# EAGLE board PCB_ALIM_version 8 problème pistes (EAGLE 9.6.2)
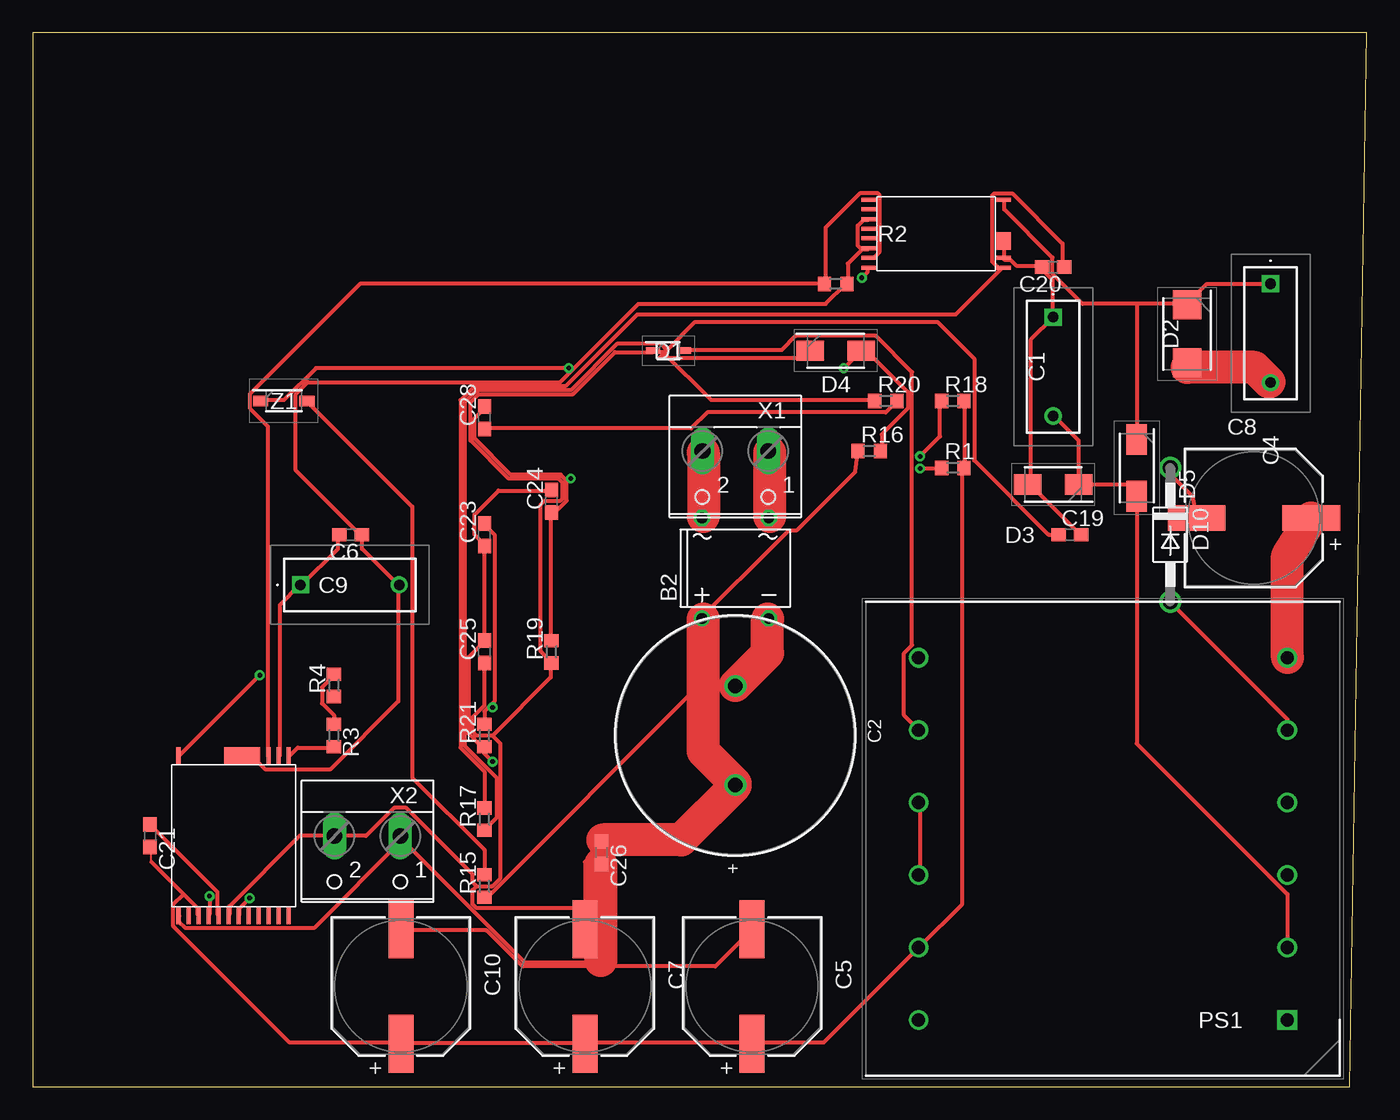
[diagram p0: board, top side]
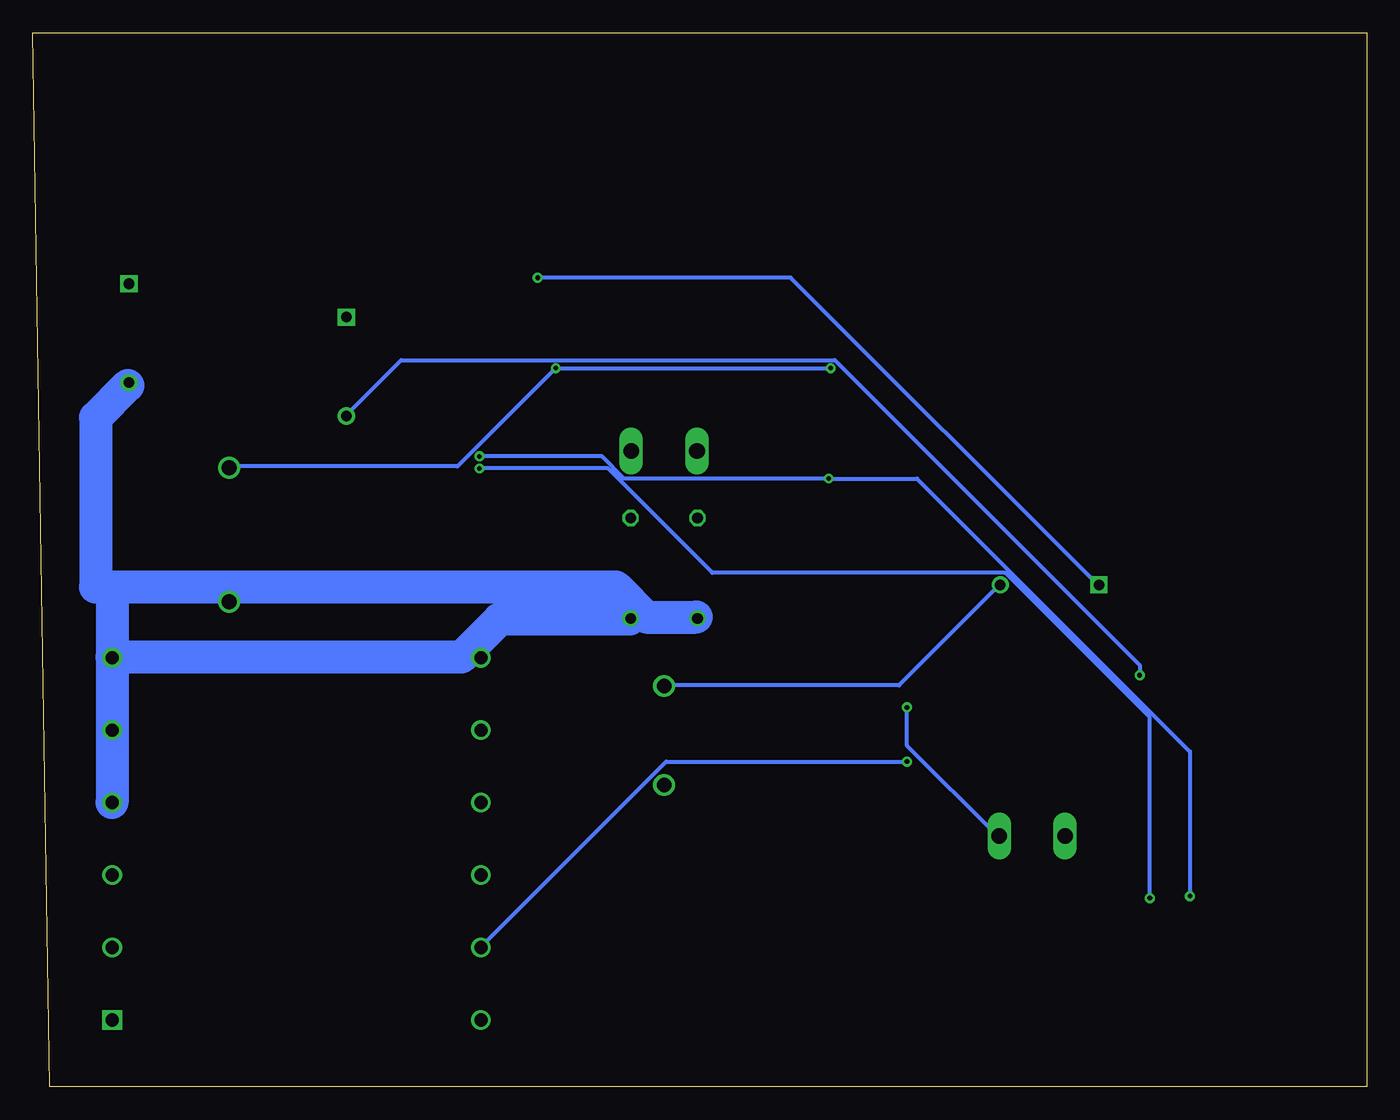
[diagram p1: board, bottom side, seen from below]

Size 101.27 x 80 mm. Coordinates in mm from the lower left corner, seen from the top.
Outline: 0,0 100,0 101.27,80 0,80 0,0
Copper layers (1*16): Top 0.035mm / dielectric 1.5mm / Bottom 0.035mm
Design rules "ENSEA_2022_04_08": minimum track width 0.2mm, minimum drill 0.6mm, track to track 0.2mm, track to pad 0.2mm, pad to pad 0.185mm, via to via 0.2mm, smd to smd 0.185mm, copper to edge 1mm, drill to drill 0.4mm, minimum pad ring 0.2mm, minimum via ring 0.2mm, stop-mask expansion 4mil, vias tented up to drill 0mil, thermal gap 0.4mm

## Footprints (pad centres in the part's own frame; a part is rotated, then mirrored left to right if it is on the bottom)
DB = drill 0.813: + -2.54,-3.81 | drill 0.813 octagon: - 2.54,-3.81; AC1 2.54,3.81; AC2 -2.54,3.81
MKP1J012202C00KSSD = drill 0.8 pad 1.3 square: 1 0,0 | drill 0.8 pad 1.3: 2 7.5,0
WCAP-ATG8_18X41X7.5(DXL) = drill 1.1: 1 3.75,0; 2 -3.75,0
WCAP-ASLI_10X10.5(DXL) = smd 4.4 x 1.9: 1 4.35,0; 2 -4.35,0
C0603 = smd 1.1 x 1: 1 -0.85,0; 2 0.85,0
SOD2513X120N = smd 1.075 x 0.5: 1 -1.162,0; 2 1.162,0
DIOM5436X261N = smd 2.2 x 2.15: 1 -2.2,0; 2 2.2,0
SODFL5226X240N = smd 2.09 x 1.53: 1 -1.95,0; 2 1.95,0
DIOM5226X240N = smd 2.35 x 1.55: 1 -2.15,0; 2 2.15,0
DO41-10 = drill 1.118: A 5.08,0; C -5.08,0
DIPS2800W80P550L3600H2600Q12N = drill 1 pad 1.5 square: 1 0,0 | drill 1 pad 1.5: 2 0,-5.5; 3 0,-11; 4 0,-16.5; 5 0,-22; 6 0,-27.5; 7 28,-27.5; 8 28,-22; 9 28,-16.5; 10 28,-11; 11 28,-5.5; 12 28,0
R0603 = smd 1 x 1.1: 1 -0.85,0; 2 0.85,0
MINSOP-16A = smd 0.305 x 1.168: P$1 -2.578,-5.08; P$2 -1.841,-5.08; P$3 -1.105,-5.08; P$4 -0.368,-5.08; P$5 0.368,-5.08; P$6 1.105,-5.08; P$7 1.841,-5.08; P$8 2.578,-5.08; P$9 2.578,5.08; P$10 1.841,5.08; P$16 -2.578,5.08 | smd 1.346 x 1.168: P$11 0.572,5.08
INSOP-24D = smd 0.305 x 1.321: P$1 -4.191,-6.058; P$2 -3.429,-6.058; P$3 -2.667,-6.058; P$4 -1.905,-6.058; P$5 -1.143,-6.058; P$6 -0.381,-6.058; P$7 0.381,-6.058; P$8 1.143,-6.058; P$9 1.905,-6.058; P$10 2.667,-6.058; P$11 3.429,-6.058; P$12 4.191,-6.058; P$13 4.191,6.058; P$14 3.429,6.058; P$15 2.667,6.058; P$24 -4.191,6.058 | smd 2.718 x 1.321: P$16 0.648,6.058
W237-102 = drill 1.194 long: 1 -2.5,-1.27; 2 2.5,-1.27
SOD3716X135N = smd 1.15 x 0.8: 1 -1.75,0; 2 1.75,0

## Placement (x,y rotation side)
B2  DBDB104G  [DB]  53.34,39.37 0 top
C1  MKP1J012202C00KSSD  [MKP1J012202C00KSSD]  77.47,58.42 270 top
C2  120 µF  [WCAP-ATG8_18X41X7.5(DXL)]  53.34,26.67 270 top
C4  MKP1J012202C00KSSD  [MKP1J012202C00KSSD]  93.98,60.96 270 top
C5  220 µF  [WCAP-ASLI_10X10.5(DXL)]  54.61,7.62 270 top
C6  4.7uF, 50V  [C0603]  24.13,41.91 180 top
C7  220 µF  [WCAP-ASLI_10X10.5(DXL)]  41.91,7.62 270 top
C8  220 µF  [WCAP-ASLI_10X10.5(DXL)]  92.71,43.18 0 top
C9  MKP1J012202C00KSSD  [MKP1J012202C00KSSD]  20.32,38.1 0 top
C10  220 µF  [WCAP-ASLI_10X10.5(DXL)]  27.94,7.62 270 top
C19  1uF, 100V  [C0603]  78.74,41.91 0 top
C20  100nF, 50V  [C0603]  77.47,62.23 180 top
C21  2.2uF, 25V  [C0603]  8.89,19.05 270 top
C23  1uF, 25V  [C0603]  34.29,41.91 90 top
C24  330pF, 50V  [C0603]  39.37,44.45 90 top
C25  1uF, 50V  [C0603]  34.29,33.02 90 top
C26  220pF, 250VAC  [C0603]  43.18,17.78 270 top
C28  6.8n, 50V  [C0603]  34.29,50.8 90 top
D1  BAV21WS-7-F  [SOD2513X120N]  48.26,55.88 0 top
D2  SMBJ200A  [DIOM5436X261N]  87.63,57.15 270 top
D3  US1M-13-F  [SODFL5226X240N]  77.47,45.72 180 top
D4  US1M-13-F  [SODFL5226X240N]  60.96,55.88 0 top
D5  US1K-13-F  [DIOM5226X240N]  83.82,46.99 270 top
D10  1N4933  [DO41-10]  86.36,41.91 270 top
PS1  760895441  [DIPS2800W80P550L3600H2600Q12N]  95.25,5.08 180 top
R1  47, 1/10W  [R0603]  69.85,46.99 0 top
R2  30k  [R0603]  60.96,60.96 0 top
R3  2M  [R0603]  22.86,26.67 270 top
R4  2M  [R0603]  22.86,30.48 90 top
R15  47  [R0603]  34.29,15.24 90 top
R16  2k  [R0603]  63.5,48.26 0 top
R17  3.09k  [R0603]  34.29,20.32 90 top
R18  10k  [R0603]  69.85,52.07 0 top
R19  150k, 1/8W  [R0603]  39.37,33.02 90 top
R20  10k  [R0603]  64.77,52.07 0 top
R21  0.009  [R0603]  34.29,26.67 90 top
U$3  CLAMPZERO  [MINSOP-16A]  68.58,64.77 270 top
U$4  INNOSWITCH4-CZ  [INSOP-24D]  15.24,19.05 0 top
X1  [W237-102]  53.34,46.99 180 top
X2  [W237-102]  25.4,17.78 180 top
Z1  MMSZ5243BT1G  [SOD3716X135N]  19.05,52.07 0 top

## Library data of the parts
B2 = rectifier
C1 C4 C9 = MKP1J012202C00KSSD; DESCRIPTION: Film Capacitors 630V 2200pF 10%; HEIGHT: 9mm; MANUFACTURER_NAME: WIMA; MANUFACTURER_PART_NUMBER: MKP1J012202C00KSSD; MOUSER_PART_NUMBER: 505-M102200/630/10; MOUSER_PRICE-STOCK: https://www.mouser.co.uk/ProductDetail/WIMA/MKP1J012202C00KSSD?qs=ISKKXg98%252B1mgvXB3mGEyXQ%3D%3D
C2 = Eagle_WCAP-ATG8 (rev20a); DATASHEET-URL: https://www.we-online.com/catalog/datasheet/860011381013.pdf; DF: 15%; DIAMETER: 18mm; I-LEAK: 1440uA; I-RIPPLE: 520mA; L: 41mm; OPERATING-TEMPERATURE: -40 °C up to +85 °C; PART-NUMBER: 860011381013; PITCH: 7.5mm; TECHNICAL-REFERENCE: ATAL410121M400DSPS1B000; VR: 400V(DC)
C5 C7 C8 C10 = Eagle_WCAP-ASLI (rev20a); DATASHEET-URL: https://www.we-online.com/catalog/datasheet/865080657018.pdf; DF: 12%; DIAMETER: 10mm; I-LEAK: 110uA; I-RIPPLE: 650mA; L: 10.5mm; OPERATING-TEMPERATURE: -55 °C up to +105 °C; PART-NUMBER: 865080657018; TECHNICAL-REFERENCE: ASEF105221M050DVCTEB000; VR: 50V(DC)
C6 C19-C21 C23-C26 C28 R1-R4 R15-R21 = rcl
D1 = BAV21WS-7-F; ARROW_PART_NUMBER: BAV21WS-7-F; ARROW_PRICE-STOCK: https://www.arrow.com/en/products/bav21ws-7-f/diodes-incorporated?region=nac; DESCRIPTION: Diodes Inc BAV21WS-7-F Switching Diode; HEIGHT: 1.2mm; MANUFACTURER_NAME: Diodes Inc.; MANUFACTURER_PART_NUMBER: BAV21WS-7-F; MOUSER_PART_NUMBER: 621-BAV21WS-F; MOUSER_PRICE-STOCK: https://www.mouser.co.uk/ProductDetail/Diodes-Incorporated/BAV21WS-7-F?qs=YvhBCnANyPsfd19lPwY%252BKQ%3D%3D
D2 = SMBJ200A; ARROW_PART_NUMBER: SMBJ200A; ARROW_PRICE-STOCK: https://www.arrow.com/en/products/smbj200a/littelfuse?region=nac; DESCRIPTION: Littelfuse SMBJ200A, Uni-Directional TVS Diode, 600W, 2-Pin DO-214AA; HEIGHT: 2.61mm; MANUFACTURER_NAME: LITTELFUSE; MANUFACTURER_PART_NUMBER: SMBJ200A; MOUSER_PART_NUMBER: 576-SMBJ200A; MOUSER_PRICE-STOCK: https://www.mouser.co.uk/ProductDetail/Littelfuse/SMBJ200A?qs=JJML70Qc14u62%252Bryrz1EOg%3D%3D
D3 D4 = US1M-13-F; ARROW_PART_NUMBER: US1M-13-F; ARROW_PRICE-STOCK: https://www.arrow.com/en/products/us1m-13-f/diodes-incorporated?region=europe; DESCRIPTION: Diode Fast 1A 1000V 75ns SMA Diodes Inc US1M-13-F, SMT Switching Diode, 1000V 1A, 75ns, 2-Pin DO-214AC; HEIGHT: 2.4mm; MANUFACTURER_NAME: Diodes Inc.; MANUFACTURER_PART_NUMBER: US1M-13-F; MOUSER_PART_NUMBER: 621-US1M-F; MOUSER_PRICE-STOCK: https://www.mouser.co.uk/ProductDetail/Diodes-Incorporated/US1M-13-F?qs=eQQ5Ftq4seWl6gFwdb8vMg%3D%3D
D5 = US1K-13-F; ARROW_PART_NUMBER: US1K-13-F; ARROW_PRICE-STOCK: https://www.arrow.com/en/products/us1k-13-f/diodes-incorporated; DESCRIPTION: Diodes Inc US1K-13-F Switching Diode, 1A 800V, 2-Pin SMA; HEIGHT: 2.4mm; MANUFACTURER_NAME: Diodes Inc.; MANUFACTURER_PART_NUMBER: US1K-13-F; MOUSER_PART_NUMBER: 621-US1K-F; MOUSER_PRICE-STOCK: https://www.mouser.co.uk/ProductDetail/Diodes-Incorporated/US1K-13-F?qs=mGuGFjoQO77tAHeJoOiWyQ%3D%3D
D10 = diode
PS1 = 760895441; DESCRIPTION: WE-LLCR Resonant Converter 600uH 150 W 1 Output 150W Resonant Converter, 24V; HEIGHT: 26mm; MANUFACTURER_NAME: Wurth Elektronik; MANUFACTURER_PART_NUMBER: 760895441; MOUSER_PART_NUMBER: 710-760895441; MOUSER_PRICE-STOCK: https://www.mouser.co.uk/ProductDetail/Wurth-Elektronik/760895441?qs=AAveGqk956E4qjNou%2F6iQA%3D%3D
U$3 U$4 = PowerIntegrations
X1 X2 = con-wago-500; MPN: 237-102; OC_FARNELL: unknown; OC_NEWARK: 70K9898
Z1 = MMSZ5243BT1G; ARROW_PART_NUMBER: MMSZ5243BT1G; ARROW_PRICE-STOCK: https://www.arrow.com/en/products/mmsz5243bt1g/on-semiconductor; DESCRIPTION: ON Semiconductor MMSZ5243BT1G Zener Diode, 13V 5% 0.5 W SMT 2-Pin SOD-123; HEIGHT: 1.35mm; MANUFACTURER_NAME: onsemi; MANUFACTURER_PART_NUMBER: MMSZ5243BT1G; MOUSER_PART_NUMBER: 863-MMSZ5243BT1G; MOUSER_PRICE-STOCK: https://www.mouser.co.uk/ProductDetail/ON-Semiconductor/MMSZ5243BT1G?qs=P4IOph%252Bbot9jmJtv%252Bfx8eg%3D%3D

## Nets
BPP: C6.2 C9.1 U$3.P$8 U$4.P$14
BPS: C21.1 U$4.P$5
DRAIN: C1.2 D3.1 D5.2 PS1.2 U$4.P$24
FB: C24.1 C28.2 R18.1 R19.2 U$4.P$4
FL3: C5.1 C7.1 C10.1 C21.2 C23.1 C24.2 C25.2 PS1.11 R1.2 R18.2 R21.1 U$4.P$3
FW: R1.1 U$4.P$7
GND: B2.- C2.2 C6.1 C8.1 C9.2 PS1.6 R2.2 U$3.P$3 U$3.P$6 U$4.P$16
HSD: R2.1 U$3.P$7 U$4.P$15
L: B2.AC1 X1.1
N: B2.AC2 X1.2
N$1: C8.2 D4.2 D10.C R16.2 Z1.1
N$2: R15.2 Z1.2
N$3: PS1.9 PS1.10
N$4: C28.1 R20.2
N$6: R3.2 U$4.P$13
N$7: R3.1 R4.2
N$8: C1.1 C19.2 C20.2 D3.2 U$3.P$10 U$3.P$11
N$9: C19.1 D4.1 R17.1
N$10: C20.1 R17.2 U$3.P$9
N$11: D10.A PS1.5
N$12: C4.1 D2.1 D5.1 U$3.P$16
N$13: R15.1 R16.1
N$21: D1.2 PS1.8
RTN: C23.2 C26.2 R21.2 U$4.P$1 X2.1
VCC_300V: R4.1
VCC_330V: B2.+ C2.1 C4.2 C26.1 D2.2 PS1.4
VOUT: C5.2 C7.2 C10.2 C25.1 D1.1 R19.1 R20.1 U$4.P$6 X2.2

## Tracks (layer width: path | path; a pad name or v marks a point on that pad's centre or on a via)
BPP  (via drill 0.35)
  Top 0.3: C6.2 23.16,41.91 23.16,40.84 20.42,38.1 C9.1 20.27,38.1 18.75,36.58 18.75,25.15 U$4.P$14 | v62.94,61.42 63.4,61.87 63.4,62.18 U$3.P$8
  Bottom 0.3: v62.94,61.42 43.74,61.42 20.42,38.1 C9.1
BPS
  Top 0.152: 8.99,19.81 C21.1
  Top 0.3: 8.99,19.81 14.02,14.78 14.02,13.11 U$4.P$5
DRAIN  (via drill 0.35)
  Top 0.3: PS1.2 95.25,14.63 83.82,26.06 D5.2 83.82,44.96 83.06,45.72 D3.1 79.4,45.72 79.4,49.07 77.57,50.9 C1.2 | v17.22,31.24 11.12,25.15 U$4.P$24
  Bottom 0.3: v17.22,31.24 17.22,32 40.39,55.17 73.3,55.17 77.42,51.05 C1.2
FB  (via drill 0.35)
  Top 0.3: R19.2 39.32,33.98 39.32,43.59 C24.1 39.47,43.74 39.78,43.74 40.54,44.5 40.54,45.87 | 40.54,45.87 40.54,46.02 40.08,46.48 36.27,46.48 33.53,49.23 33.53,50.75 34.29,51.51 C28.2 | v67.36,47.85 68.89,49.38 68.89,51.97 R18.1 | 40.54,45.87 v40.84,46.18 | v13.41,14.48 13.41,13.11 U$4.P$4
  Bottom 0.3: v67.36,47.85 58.06,47.85 56.39,46.18 v40.84,46.18 34.14,46.18 13.41,25.45 v13.41,14.48
FL3  (via drill 0.35)
  Top 0.152: 8.99,17.07 8.99,18.14 C21.2
  Top 0.3: 41.91,3.35 54.56,3.35 C5.1 54.71,3.35 60.05,3.35 67.21,10.52 PS1.11 67.36,10.67 70.56,13.87 70.56,46.94 R1.2 70.71,47.09 70.71,51.97 R18.2 | 11.43,14.63 12.5,13.56 12.5,13.11 U$4.P$3 | 11.43,14.63 8.99,17.07 | 11.43,14.63 10.67,13.87 10.67,12.19 19.51,3.35 27.89,3.35 C10.1 28.04,3.35 41.91,3.35 | 41.91,3.35 C7.1 | C24.2 39.32,45.26 35.36,45.26 33.53,43.43 33.53,41.91 34.29,41.15 C23.1 C25.2 34.29,33.83 33.07,32.61 33.07,26.82 33.98,25.91 34.29,25.91 R21.1 34.29,25.3 v34.9,24.69
  Bottom 0.3: v34.9,24.69 53.19,24.69 67.21,10.67 PS1.11
FW  (via drill 0.35)
  Top 0.3: v67.36,46.94 68.89,46.94 R1.1 | v16.46,14.33 15.7,13.56 15.7,13.11 U$4.P$7
  Bottom 0.3: v67.36,46.94 57.61,46.94 49.68,39.01 27.43,39.01 16.46,28.04 v16.46,14.33
GND
  Top 0.3: 55.78,35.51 B2.- | 53.34,30.48 C2.2 | 62.94,63.55 61.87,62.48 61.87,60.96 R2.2 61.72,60.96 60.2,59.44 45.97,59.44 40.03,53.49 20.88,53.49 19.96,52.58 19.96,46.79 24.84,41.91 C6.1 24.99,41.91 24.99,40.84 27.74,38.1 | 62.94,63.55 63.4,63.55 U$3.P$6 62.94,63.55 | 62.94,63.55 62.64,63.86 62.64,65.38 63.09,65.84 63.4,65.84 U$3.P$3 | 27.74,38.1 27.74,29.26 22.55,24.08 17.68,24.08 16.76,24.99 16,24.99 U$4.P$16 | 27.74,38.1 C9.2
  Top 2.5: PS1.6 95.25,40.31 C8.1 | 55.78,35.51 55.78,32.92 53.34,30.48
  Bottom 0.3: C2.2 53.34,30.48 35.51,30.48 27.89,38.1 C9.2 | 95.25,32.61 PS1.6 | 55.93,35.51 B2.-
  Bottom 2.5: 95.25,32.61 68.73,32.61 65.84,35.51 55.93,35.51
HSD
  Top 0.3: U$3.P$7 63.55,62.94 63.86,62.94 64.31,63.4 64.31,67.67 64.16,67.82 62.79,67.82 60.2,65.23 60.2,60.96 R2.1 24.84,60.96 16.46,52.58 16.46,51.51 17.83,50.14 17.83,25.15 U$4.P$15
L
  Top 0.3: 55.93,43.28 B2.AC1 | 55.93,48.16 X1.1
  Top 2.5: 55.93,48.16 55.93,43.28
N
  Top 0.3: 50.9,43.28 B2.AC2 | 50.9,48.16 X1.2
  Top 2.5: 50.9,48.16 50.9,43.28
N$1  (via drill 0.35)
  Top 0.3: D10.C 86.41,46.94 86.41,46.48 88.05,44.84 C8.2 | R16.2 64.47,48.31 64.47,49.53 66.45,51.51 66.45,52.73 63.4,55.78 62.94,55.78 D4.2 62.79,55.78 v61.57,54.56 | v40.69,54.56 21.49,54.56 19.05,52.12 17.37,52.12 Z1.1
  Bottom 0.3: v40.69,54.56 v61.57,54.56 69.04,47.09 86.26,47.09 D10.C
N$2
  Top 0.3: R15.2 34.29,17.98 28.8,23.47 28.8,44.04 20.88,51.97 Z1.2
N$3
  Top 0.3: PS1.10 67.36,16.15 67.36,21.49 PS1.9
N$4
  Top 0.3: C28.1 34.29,49.99 49.99,49.99 51.21,51.21 64.77,51.21 65.53,51.97 R20.2
N$6
  Top 0.3: R3.2 22.86,25.76 20.12,25.76 19.51,25.15 U$4.P$13
N$7
  Top 0.3: R3.1 22.86,28.19 21.95,29.11 21.95,30.33 22.86,31.24 R4.2
N$8
  Top 0.3: 75.74,45.72 79.55,41.91 C19.2 | 75.74,45.72 D3.2 75.59,45.72 | U$3.P$11 73.76,64.16 73.76,62.94 U$3.P$10 73.76,62.79 74.22,62.79 74.68,62.33 76.5,62.33 C20.2 76.5,62.18 77.42,61.27 77.42,58.52 C1.1 75.74,56.69 75.74,45.72
N$9
  Top 0.3: 48.16,55.93 47.7,56.39 44.35,56.39 40.84,52.88 33.68,52.88 32.77,51.97 32.77,25.91 35.2,23.47 35.2,20.42 34.29,19.51 R17.1 | D4.1 58.98,55.78 58.52,55.32 47.55,55.32 48.16,55.93 | C19.1 77.11,41.91 71.48,47.55 71.48,55.27 68.68,58.06 50.29,58.06 48.16,55.93
N$10
  Top 0.3: R17.2 34.29,23.93 32.46,25.76 32.46,52.12 33.53,53.19 40.44,53.19 45.87,58.62 70.05,58.62 73.46,62.03 | 73.46,62.03 73.61,62.18 U$3.P$9 | 73.46,62.03 72.85,62.64 72.85,67.67 73,67.82 74.37,67.82 78.18,64.01 78.18,62.33 C20.1
N$11
  Top 0.3: PS1.5 95.25,27.89 86.41,36.73 D10.A
N$12
  Top 0.3: 87.63,59.44 83.82,59.44 | 83.82,59.44 79.7,59.44 77.42,61.72 77.42,62.94 73.76,66.6 73.76,67.21 U$3.P$16 | 83.82,59.44 D5.1 | C4.1 89.15,60.96 87.63,59.44 | 87.63,59.44 D2.1
N$13
  Top 0.3: R15.1 34.29,14.48 34.59,14.48 49.84,29.72 49.84,34.7 57.35,42.22 57.96,42.22 62.44,46.69 R16.1
N$21
  Top 0.3: D1.2 49.53,55.93 56.84,55.93 57.91,57 64.01,57 66.75,54.25 66.75,33.53 66.14,32.92 66.14,28.19 67.21,27.13 PS1.8
RTN  (via drill 0.35)
  Top 0.3: R21.2 34.29,28.5 34.75,28.96 | 34.75,28.96 35.05,29.26 35.05,41.91 34.29,42.67 C23.2 | 43.13,9.6 42.98,9.45 37.34,9.45 28.04,18.75 | 28.04,18.75 28.04,19.05 X2.1 28.04,18.75 | 43.13,16.92 C26.2 | 28.04,18.75 21.34,12.04 11.58,12.04 11.12,12.5 11.12,12.95 U$4.P$1 | v34.9,28.8 34.75,28.96
  Top 2.5: 43.13,9.6 43.13,16.92
  Bottom 0.3: v34.9,28.8 34.9,25.91 28.04,19.05 X2.1
VCC_330V
  Top 0.3: 43.28,18.75 C26.1 | 53.34,22.86 C2.1 53.34,23.01 | 50.9,35.51 B2.+ | 87.63,54.61 D2.2 | 93.88,53.49 C4.2
  Top 2.5: 43.28,18.75 49.23,18.75 53.34,22.86 | 50.9,35.51 50.9,25.45 53.34,23.01 | 87.63,54.61 92.76,54.61 93.88,53.49
  Bottom 0.3: 94.07,53.25 C4.2 | 96.52,37.95 95.25,37.95 | 50.9,35.66 B2.+
  Bottom 2.5: 96.52,37.95 96.52,50.8 94.07,53.25 | PS1.4 95.25,37.95 57,37.95 54.71,35.66 50.9,35.66
VOUT
  Top 0.3: R20.1 63.86,52.12 51.51,52.12 47.85,55.78 47.24,55.78 D1.1 47.09,55.78 44.2,55.78 41,52.58 33.83,52.58 33.22,51.97 33.22,49.07 36.12,46.18 39.93,46.18 40.23,45.87 40.23,44.65 40.08,44.5 38.86,44.5 38.56,44.2 38.56,33.07 39.32,32.31 R19.1 39.32,32.16 39.32,31.09 34.9,26.67 | U$4.P$6 14.94,13.11 14.94,13.72 20.27,19.05 X2.2 25.3,19.05 27.43,21.18 28.35,21.18 33.38,16.15 33.38,15.54 33.68,15.24 | C25.1 34.29,28.96 33.38,28.04 33.38,26.98 33.68,26.67 34.9,26.67 | 44.04,9.14 51.82,9.14 54.56,11.89 C5.2 | 44.04,9.14 37.19,9.14 34.44,11.89 28.04,11.89 C10.2 | 41.91,13.56 41.91,17.07 42.67,17.83 43.74,17.83 44.04,17.53 44.04,9.14 | 34.9,26.67 35.51,26.06 35.51,15.85 34.9,15.24 33.68,15.24 | 33.68,15.24 33.38,14.94 33.38,13.87 33.68,13.56 41.91,13.56 | 41.91,13.56 C7.2